# EAGLE board BNC-V004 (EAGLE 6.5.0)
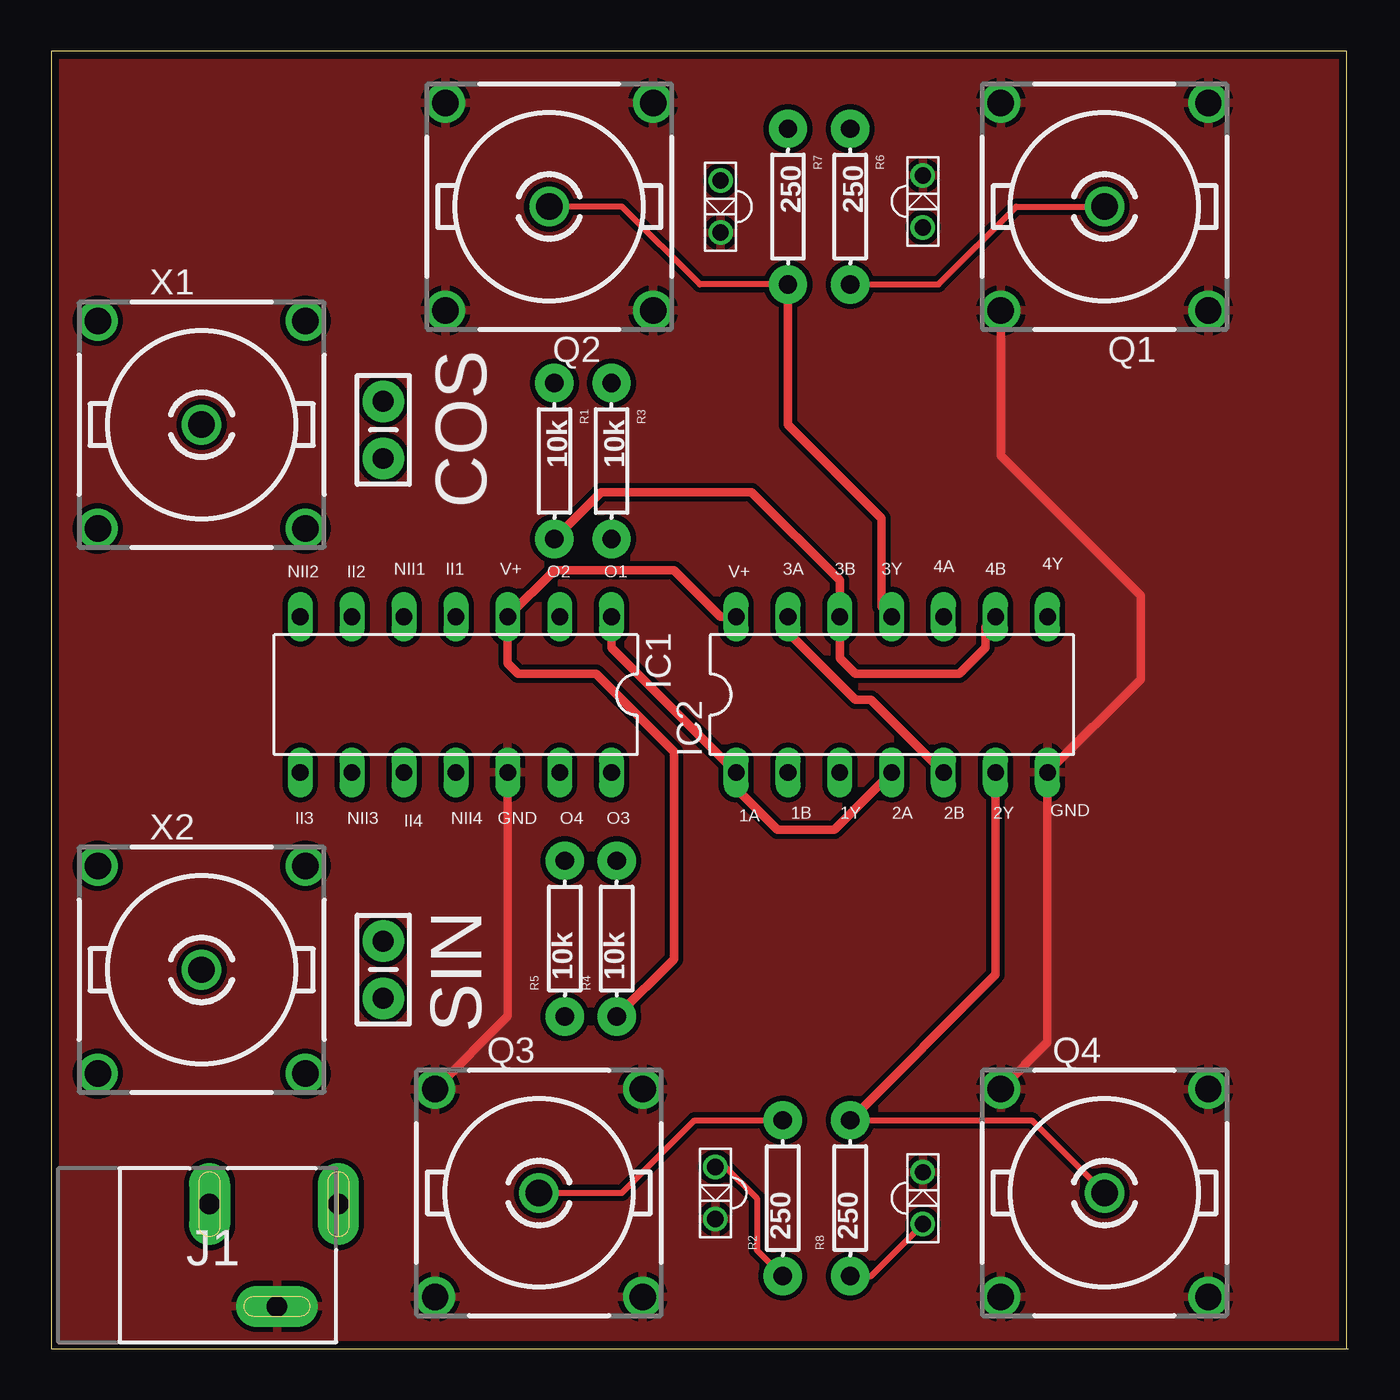
[diagram p0: board, top side]
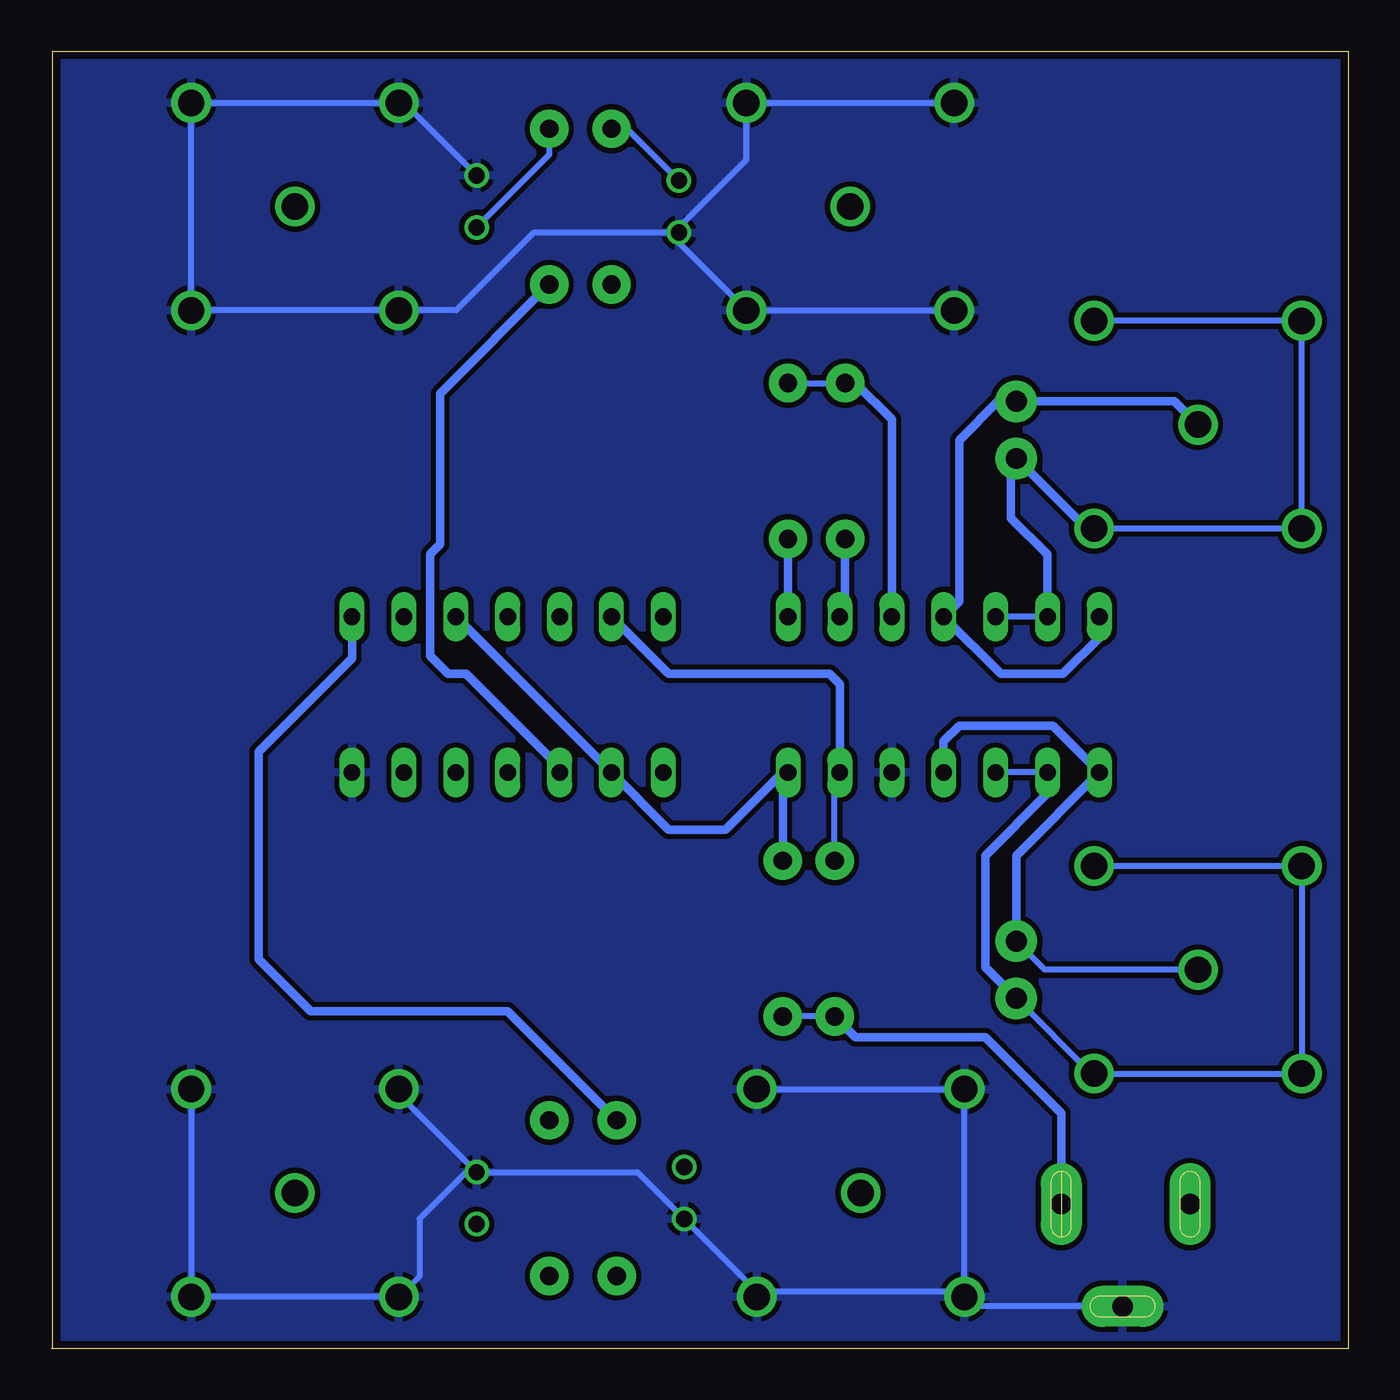
[diagram p1: board, bottom side, seen from below]

Size 63.5 x 63.49 mm. Coordinates in mm from the lower left corner, seen from the top.
Outline: 63.42,0 63.42,63.49 0,63.49 0,0 63.5,0
Copper layers (1*16): Top 0.0356mm / dielectric 1.5011mm / Bottom 0.0356mm
Design rules "LaenPCBOrder": minimum track width 6mil, minimum drill 13mil, track to track 6mil, track to pad 6mil, pad to pad 6mil, via to via 6mil, smd to smd 6mil, copper to edge 15mil, drill to drill 6mil, minimum pad ring 7mil, minimum via ring 7mil, stop-mask expansion 3mil, vias tented up to drill 0mil, thermal gap 10mil

## Footprints (pad centres in the part's own frame; a part is rotated, then mirrored left to right if it is on the bottom)
CAP-PTH-SMALL-KIT = drill 1.016 pad 2.032: 1 -1.397,0; 2 1.397,0
LTE-302 = drill 0.8: A 1.27,0; C -1.27,0
DIL14 = drill 0.813 long: 1 -7.62,-3.81; 2 -5.08,-3.81; 3 -2.54,-3.81; 4 0,-3.81; 5 2.54,-3.81; 6 5.08,-3.81; 7 7.62,-3.81; 8 7.62,3.81; 9 5.08,3.81; 10 2.54,3.81; 11 0,3.81; 12 -2.54,3.81; 13 -5.08,3.81; 14 -7.62,3.81
POWER_JACK_SLOT = drill 1 pad 2 long: GND@1 2.58,7.5; GND@2 7.58,10.8; PWR 2.58,13.8
R141426 = drill 1.295: 1 0,0; 2 5.08,5.08; 3 -5.08,5.08; 4 -5.08,-5.08; 5 5.08,-5.08
AXIAL-0.3 = drill 0.9 pad 1.88: P$1 -3.81,0; P$2 3.81,0

## Placement (x,y rotation side)
C1  [CAP-PTH-SMALL-KIT]  16.26,18.54 270 top
C3  [CAP-PTH-SMALL-KIT]  16.26,44.96 270 top
IAG2-D2  [LTE-302]  42.67,7.37 270 top
IAG3-D3  [LTE-302]  32.51,7.62 90 top
IAG4-D4  [LTE-302]  32.77,55.88 90 top
IAG-D1  [LTE-302]  42.67,56.13 270 top
IC1  LM339N  [DIL14]  19.81,32 180 top
IC2  74AC08N  [DIL14]  41.15,32 0 top
J1  POWER_JACKSLT  [POWER_JACK_SLOT]  0.25,9.65 270 top
Q1  R141426  [R141426]  51.56,55.88 180 top
Q2  R141426  [R141426]  24.38,55.88 180 top
Q3  R141426  [R141426]  23.88,7.62 0 top
Q4  R141426  [R141426]  51.56,7.62 0 top
R1  10k  [AXIAL-0.3]  24.64,43.43 270 top
R2  250  [AXIAL-0.3]  35.81,7.37 90 top
R3  10k  [AXIAL-0.3]  27.43,43.43 270 top
R4  10k  [AXIAL-0.3]  27.69,20.07 90 top
R5  10k  [AXIAL-0.3]  25.15,20.07 90 top
R6  250  [AXIAL-0.3]  39.12,55.88 270 top
R7  250  [AXIAL-0.3]  36.07,55.88 270 top
R8  250  [AXIAL-0.3]  39.12,7.37 90 top
X1  R141426  [R141426]  7.37,45.21 0 top
X2  R141426  [R141426]  7.37,18.54 0 top

## Library data of the parts
C1 C3 = SparkFun-Capacitors; PROD_ID: CAP-08370
IAG2-D2 IAG3-D3 IAG4-D4 IAG-D1 = SparkFun-LED
IC1 = linear
IC2 = 74xx-eu
J1 = SparkFun-Connectors; PROD_ID: PRT-00119
Q1-Q4 X1 X2 = con-coax; MF: FARNELL; MPN: R141426161; OC_FARNELL: 4195115; OC_NEWARK: 14J7919
R1 R3-R5 = SparkFun-Resistors; PROD_ID: RES-12183
R2 R6-R8 = SparkFun-Resistors; PROD_ID: RES-12182

## Nets
5V: IC1.3 IC2.14 J1.PWR R1.P$1 R3.P$1 R4.P$1 R5.P$1
GND: IAG2-D2.C IAG3-D3.C IAG4-D4.C IAG-D1.C IC1.12 IC2.7 J1.GND@2 Q1.2 Q1.3 Q1.4 Q1.5 Q2.2 Q2.3 Q2.4 Q2.5 Q3.2 Q3.3 Q3.4 Q3.5 Q4.2 Q4.3 Q4.4 Q4.5
N$1: IC1.2 IC2.9 IC2.12 R1.P$2
N$2: IC2.11 Q2.1 R7.P$2
N$3: IAG4-D4.A R7.P$1
N$4: IC1.1 IC2.1 IC2.4 R3.P$2
N$5: IC1.14 IC2.2 IC2.10 R4.P$2
N$6: IC1.13 IC2.5 IC2.13 R5.P$2
N$7: C3.2 IC1.5 IC1.6 X1.2 X1.3 X1.4 X1.5
N$8: C3.1 IC1.4 IC1.7 X1.1
N$9: C1.1 IC1.8 IC1.11 X2.1
N$11: C1.2 IC1.9 IC1.10 X2.2 X2.3 X2.4 X2.5
N$12: IC2.8 Q3.1 R2.P$2
N$13: IAG3-D3.A R2.P$1
N$14: IC2.6 Q4.1 R8.P$2
N$15: IAG2-D2.A R8.P$1
N$16: IC2.3 Q1.1 R6.P$2
N$17: IAG-D1.A R6.P$1

## Tracks (layer width: path | path; a pad name or v marks a point on that pad's centre or on a via)
5V
  Top 0.406: R4.P$1 30.48,19.05 30.48,29.21 26.67,33.02 22.86,33.02 22.35,33.53 IC1.3 24.64,38.1 30.48,38.1 32.77,35.81 IC2.14
  Bottom 0.305: R5.P$1 R4.P$1 | R3.P$1 R1.P$1 24.13,47.24 23.88,47.24
  Bottom 0.406: J1.PWR 14.05,11.51 17.78,15.24 24.13,15.24 R5.P$1 | IC1.3 22.35,45.47 24.13,47.24
GND
  Top 0.406: IC1.12 22.35,16.26 Q3.3 | Q1.2 46.48,43.69 53.34,36.83 53.34,32.77 IC2.7 48.77,14.99 Q4.3
  Bottom 0.305: J1.GND@2 18.33,2.07 Q3.4 | Q3.4 Q3.3 Q3.2 | Q4.3 46.48,12.45 IAG2-D2.C | IAG2-D2.C 34.8,8.64 IAG3-D3.C 28.96,2.79 Q3.5 28.7,2.79 19.05,2.79 Q3.4 | IAG4-D4.C 32.77,54.1 Q2.3 Q2.2 | IAG-D1.C 46.23,60.96 Q1.5 Q1.4 Q1.3 Q1.2 43.69,50.8 39.88,54.61 IAG4-D4.C | Q4.2 Q4.5 Q4.4 45.47,3.56 45.47,6.35 43.18,8.64 IAG2-D2.C | IAG4-D4.C 32.77,54.86 29.46,58.17 Q2.4 Q2.5
  pour Top (isolate 0.254): 0,63.5 63.5,63.5 63.5,0 0,0
  pour Bottom (isolate 0.254): 0,63.5 63.5,63.5 63.5,0 0,0
N$1
  Top 0.406: IC2.9 45.72,35.31 45.72,34.29 44.45,33.02 39.37,33.02 38.61,33.78 IC2.12 38.61,37.59 34.29,41.91 26.92,41.91 R1.P$2
  Bottom 0.406: R1.P$2 24.64,36.07 IC1.2
N$2
  Top 0.305: R7.P$2 31.75,52.07 27.94,55.88 Q2.1
  Top 0.406: R7.P$2 36.07,45.21 40.64,40.64 40.64,36.32 IC2.11
N$3
  Bottom 0.305: R7.P$1 35.31,59.69 IAG4-D4.A
N$4
  Top 0.406: IC2.4 38.35,25.4 35.56,25.4 33.53,27.43 IC2.1 27.43,34.29 IC1.1
  Bottom 0.406: R3.P$2 IC1.1
N$5
  Bottom 0.406: R4.P$2 27.69,27.94 IC1.14 27.69,28.19 30.48,25.4 33.27,25.4 IC2.2 IC2.10
N$6
  Top 0.406: IC2.13 36.07,35.05 39.37,31.75 40.13,31.75 IC2.5
  Bottom 0.305: R5.P$2 25.15,27.18 IC1.13
  Bottom 0.406: IC1.13 24.89,32.51 25.4,33.02 33.27,33.02 IC2.13
N$7
  Bottom 0.305: X1.2 X1.3 X1.4 X1.5 | IC1.6 IC1.5
  Bottom 0.406: X1.5 12.83,40.13 C3.2 16.51,43.31 16.51,40.64 14.73,38.86 IC1.6
N$8
  Bottom 0.406: IC1.7 12.19,34.8 13.97,33.02 17.02,33.02 IC1.4 19.05,36.58 19.05,44.45 17.14,46.35 C3.1 8.51,46.35 X1.1
N$9
  Bottom 0.305: X2.1 14.86,18.54 C1.1
  Bottom 0.406: C1.1 16.26,24.13 IC1.8 14.48,30.48 19.05,30.48 19.81,29.72 IC1.11
N$11
  Bottom 0.305: X2.2 X2.3 X2.4 X2.5 12.57,13.46 C1.2 | IC1.9 IC1.10
  Bottom 0.406: IC1.9 14.73,27.18 17.78,24.13 17.78,18.67 C1.2
N$12
  Top 0.305: Q3.1 27.94,7.62 31.5,11.18 R2.P$2
  Bottom 0.406: IC2.8 48.77,33.78 53.34,29.21 53.34,19.05 50.8,16.51 41.15,16.51 R2.P$2
N$13
  Top 0.305: IAG3-D3.A 33.02,8.89 34.54,7.37 34.54,4.83 R2.P$1
N$14
  Top 0.305: R8.P$2 48.01,11.18 Q4.1
  Top 0.406: IC2.6 46.23,18.29 R8.P$2
N$15
  Top 0.305: R8.P$1 40.13,3.56 IAG2-D2.A
N$16
  Top 0.305: R6.P$2 43.43,52.07 47.24,55.88 Q1.1
  Bottom 0.406: IC2.3 38.61,28.45 43.18,33.02 44.07,33.02 44.96,33.91 44.96,38.86 44.45,39.37 44.45,46.74 R6.P$2
N$17
  Bottom 0.305: R6.P$1 39.12,58.42 IAG-D1.A

## Text on the board
tPlace: COS | NII2 | II2 | NII1 | II1 | V+ | O2 | O1 | V+ | 3A | 3B | 3Y | 4A | 4B | 4Y | II3 | NII3 | II4 | NII4 | GND | O4 | O3 | 1A | 1B | 1Y | 2A | 2B | 2Y | GND | SIN